# Altium PCB ESP32-Sense Kit Motherboard.PcbDoc
Units mil, origin at the board's own origin, x right, y up, seen from the top; angles counter-clockwise.
Board outline 2591.41 x 4407.24 mil, 2 copper layers (Top, Bottom), stack 12.7 mil thick; 70 components, 69 nets, 255 pads, 116 vias.
Unrouted connection lines stored in the file: 73.
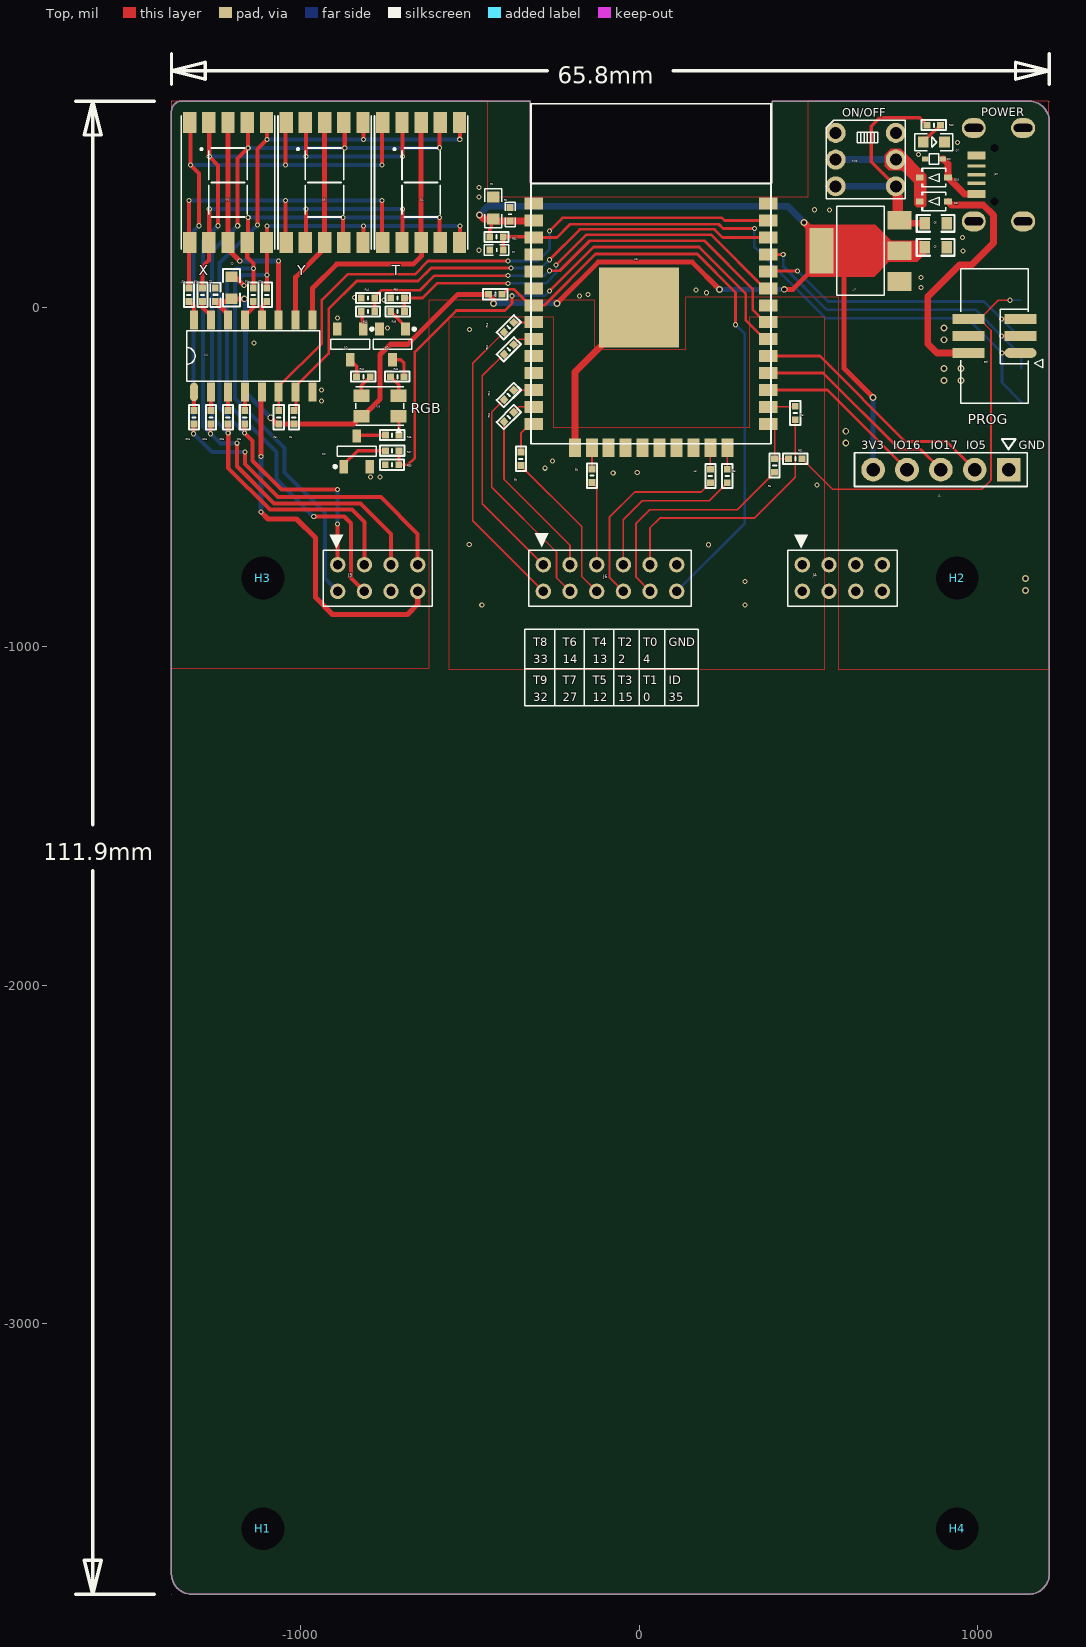
[diagram p0: Top view]
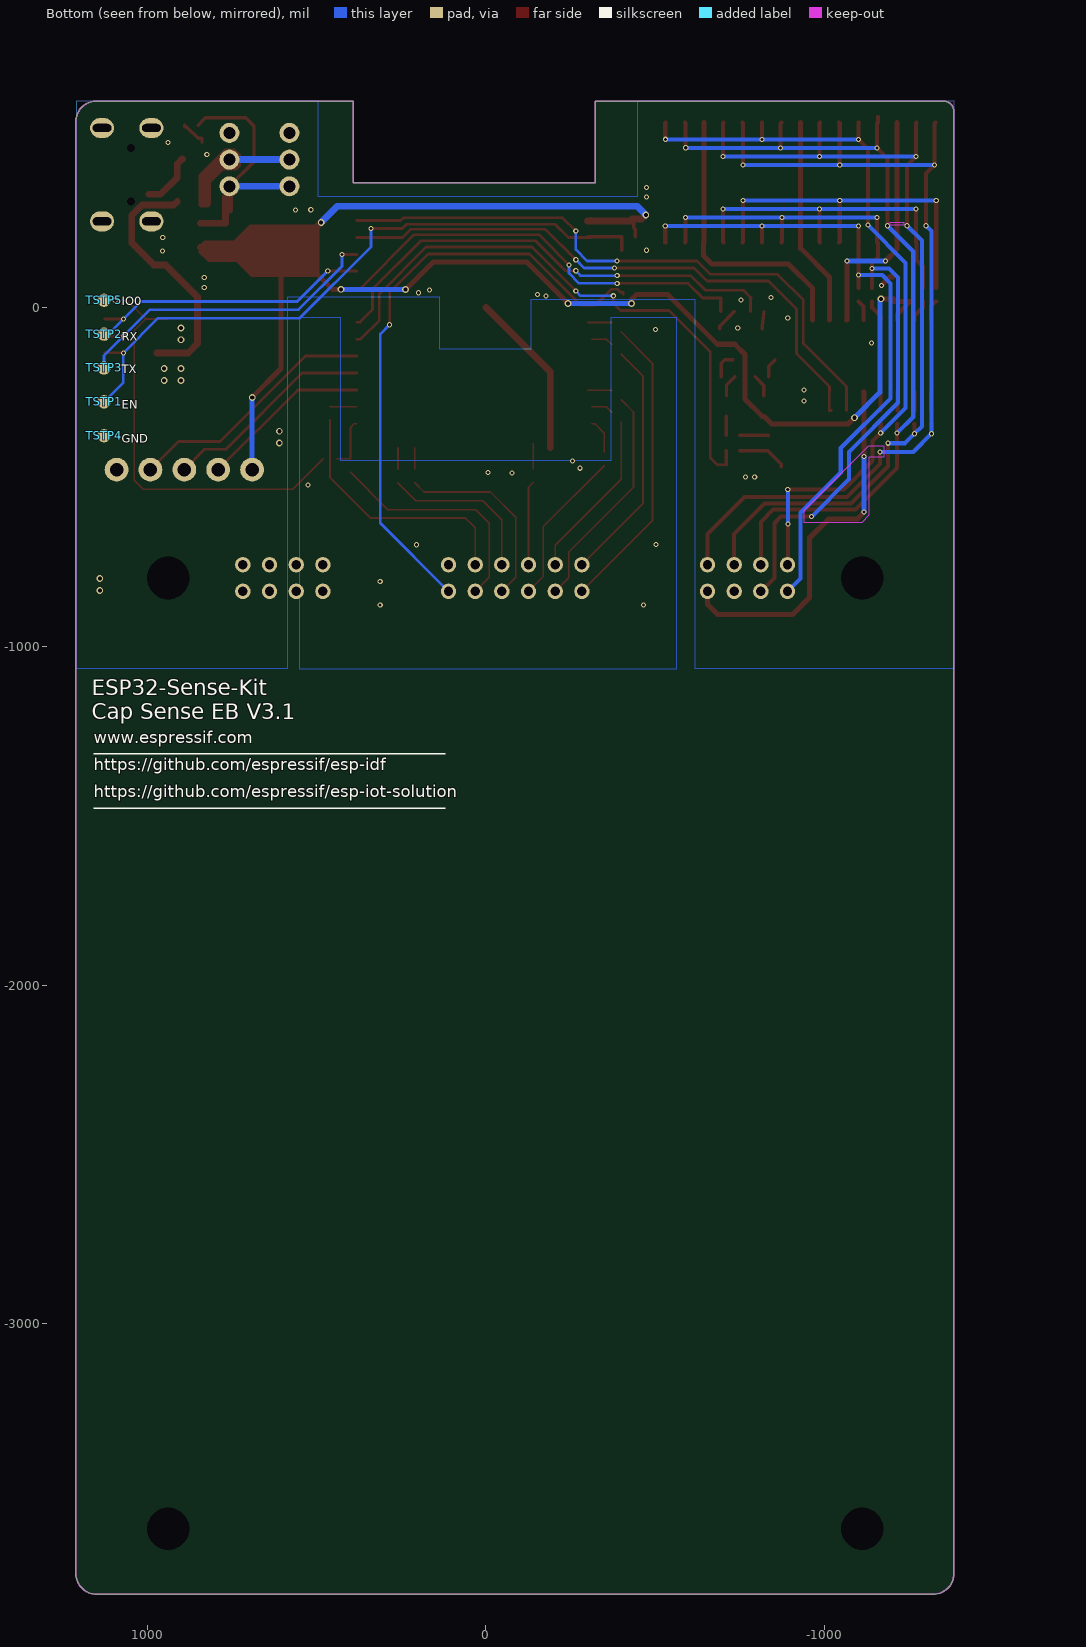
[diagram p1: Bottom view, seen from below]

## Layer stack, top to bottom
Solder Mask Top: solder mask 0.4, Solder Resist, Dk 3.5
Top: signal copper 1.35
Dielectric 1: dielectric 10, FR-4, Dk 4.3
Bottom: signal copper 1.35
Solder Mask Bottom: solder mask 0.4, Solder Resist, Dk 3.5

## Board outline
1210.64,550.32 1210.64,550.36 ccw(c1150.47,549.2) 1149.36,609.37 392,609.37 392,368 -322,368 -322,609.01 -1351.51,609.36 ccw(c-1351.51,580.11) -1380.77,580.12 -1380.77,-3738.81 ccw(c-1321.71,-3738.81) -1321.71,-3797.86 1149.36,-3797.86 1149.32,-3797.86 ccw(c1150.47,-3737.69) 1210.64,-3738.81 1210.64,-3318.98

## Design rules (kind name [scope] priority, off if disabled: settings)
Clearance "Clearance - Net - ESP_GPIO0_B" [InNet('ESP_GPIO0_B')] p1: gap=6 ignorepadtopadclearanceinfootprint=FALSE except(0: Arc-Hole Track-Hole SMDPad-Hole THPad-Hole Via-Hole Fill-Hole Poly-Hole Region-Hole Text-Hole; 8: THPad-Fill THPad-Poly THPad-Region Fill-Fill Fill-Poly Fill-Region Poly-Poly Poly-Region Region-Region; 10: SMDPad-Fill SMDPad-Poly SMDPad-Region Via-Fill Via-Poly Via-Region Text-Text; 30: Arc-Fill Arc-Poly Arc-Region Track-Fill Track-Poly Track-Region)
Clearance "Clearance - NetClass - ClearanceClass_3(RuleSet)" [InNetClass('ClearanceClass_3(RuleSet)')] p2: gap=6 ignorepadtopadclearanceinfootprint=FALSE except(0: Arc-Hole Track-Hole SMDPad-Hole THPad-Hole Via-Hole Fill-Hole Poly-Hole Region-Hole Text-Hole; 10: Text-Text; 40: Arc-Fill Arc-Poly Arc-Region Track-Fill Track-Poly Track-Region SMDPad-Fill SMDPad-Poly SMDPad-Region THPad-Fill THPad-Poly THPad-Region)
Clearance "Clearance - Default - DEFAULT - Via" [IsVia vs IsVia] p3: gap=6 ignorepadtopadclearanceinfootprint=FALSE
Clearance "Clearance - Default - DEFAULT- SMD" [IsVia vs IsSMTPin] p4: gap=6 ignorepadtopadclearanceinfootprint=FALSE
Clearance "Clearance - Default - DEFAULT - Net" [All] p5: gap=6 ignorepadtopadclearanceinfootprint=FALSE except(0: Arc-Hole Track-Hole SMDPad-Hole THPad-Hole Via-Hole Fill-Hole Poly-Hole Region-Hole Text-Hole; 8: Arc-Fill Arc-Poly Arc-Region Track-Fill Track-Poly Track-Region SMDPad-Fill SMDPad-Poly SMDPad-Region THPad-Fill THPad-Poly THPad-Region Via-Fill Via-Poly Via-Region Fill-Fill Fill-Poly Fill-Region Poly-Poly Poly-Region Region-Region; 10: Text-Text)
ComponentClearance "ComponentClearance - Default - DEFAULT" [All] p1: gap=6 collisioncheckmode=3 verticalgap=10 showdistances=FALSE
FanoutControl Fanout_Small [(CompPinCount < 5)] p1: bgadir=Out bgaviamode=Centered fanoutstyle=Auto fanoutdirection=OutThenIn viagrid=1 // Fanout_Small (Default Rule)
FanoutControl Fanout_BGA [IsBGA] p2: bgadir=Out bgaviamode=Centered fanoutstyle=Auto fanoutdirection=Alternating viagrid=1 // Fanout_BGA (Default Rule)
FanoutControl Fanout_LCC [IsLCC] p3: bgadir=Out bgaviamode=Centered fanoutstyle=Auto fanoutdirection=Alternating viagrid=1 // Fanout_LCC (Default Rule)
FanoutControl Fanout_SOIC [IsSOIC] p4: bgadir=Out bgaviamode=Centered fanoutstyle=Auto fanoutdirection=Alternating viagrid=1 // Fanout_SOIC (Default Rule)
HoleToHoleClearance "HoleToHoleClearance - Default - DEFAULT" [All] p1: gap=6 allowstackedmicrovias=TRUE
Length "Default Length" [All] p1: maxlimit=50000 minlimit=0
MaxMinImpedance "Default Impedance" [All] p1: minimum=50.00 maximum=150.0
ParallelSegment "Default Parallel Segment Adjasent" [All] p1: limit=1000 gap=200
ParallelSegment "Default Parallel Segment Same Layer" [All] p2: limit=1000 gap=200
PlaneConnect "Default PlaneConnect" [All] p1: planeconnectstyle=Relief reliefexpansion=20 reliefentries=0 reliefconductorwidth=8 reliefairgap=10
PolygonConnect "PolygonConnect - Default SMT" [IsSMTPin] p1: connectstyle=Direct reliefconductorwidth=10 reliefentries=4 polygonreliefangle="45 Angle" airgapwidth=10
PolygonConnect "PolygonConnect - Default Pad" [All] p2: connectstyle=Direct reliefconductorwidth=8 reliefentries=4 polygonreliefangle="45 Angle" airgapwidth=10
RoutingLayers "RoutingLayers - Default - DEFAULT" [All] p1: top layer_v5=TRUE bottom layer_v5=TRUE
RoutingPriority "RoutingPriority - Default - DEFAULT" [All] p1: routingpriority=3
RoutingTopology "Default Routing Topology" [All] p1: topology=Shortest
RoutingVias "RoutingVias - Default - DEFAULT" [All] p1: holewidth=9 width=15 viastyle="Through Hole" minholewidth=9 minwidth=15 maxholewidth=9 maxwidth=15
SMDToCorner "SMDToCorner - Default - DEFAULT" [All] p1: distance=60000
SolderMaskExpansion [All] p1: expansion=4
Width "Default Width" [All] p1: maxlimit=40 minlimit=5 preferedwidth=8
20 further rules are at their usual default settings.

## Classes and differential pairs
net class +5V*N169918061: +5V N169918061
net class +5V_A*VBUS_5V: +5V_A VBUS_5V
net class EN*VDD33: EN VDD33
net class ESP_IO18*N17021018: ESP_IO18 N17021018
net class ESP_IO19*N17021076: ESP_IO19 N17021076
net class N17021053*RGB_B-: N17021053 RGB_B-
net class ClearanceClass_3(RuleSet): ESP_TCH_0 ESP_TCH_0_A ESP_TCH_1 ESP_TCH_1_A ESP_TCH_2 ESP_TCH_2_A ESP_TCH_3 ESP_TCH_3_A ESP_TCH_4 ESP_TCH_4_A ESP_TCH_5 ESP_TCH_5_A ESP_TCH_6 ESP_TCH_6_A ESP_TCH_7 ESP_TCH_7_A ESP_TCH_8 ESP_TCH_8_A ESP_TCH_9 ESP_TCH_9_A

## Components (designator, comment, footprint, x,y, rotation, side; value= is the part's Value field where it differs from the comment)
C1 "0603C" 0603C -1203.27,58.64 r270 top
C2 "0402C" 0402C -1251.27,37.64 r270 top
C3 "0603C" 0603C 875.25,178.05 r180 top
C4 "C0603" C0603 -431.08,293.78 r270 top
C5 "C0402" C0402 -381.08,275.28 r90 top
C6 "0603C" 0603C 875.25,248.92 r180 top
C7 "C0402" C0402 -421.08,169.84 r180 top
D7 "0603D$2F$A" 0603D$2F$A 869.79,488.63 r0 top
D8 "SOD-323" SOD-323 869.79,313.63 r0 top
D9 "SOD-523" SOD-523 869.79,438.63 r180 top
D10 "SOD-323" SOD-323 869.79,383.63 r0 top
H1 "MTGH200C125D-N" MTGH200C125D-N -1110.77,-3604.57 r0 top
H2 "MTGH200C125D-N" MTGH200C125D-N 938.41,-798.25 r0 top
H3 "MTGH200C125D-N" MTGH200C125D-N -1110.77,-798.25 r0 top
H4 "MTGH200C125D-N" MTGH200C125D-N 938.41,-3604.57 r0 top
J1 "CON_5X1_2P54" CON_5X1_2P54 890.51,-478.26 r180 top
J4 "CON_F_4X2_2P00_IP" CON_F_4X2_2P00_IP 599.64,-798.25 r0 top
J5 "CON_F_4X2_2P00_IP" CON_F_4X2_2P00_IP -772,-798.25 r0 top
J6 "CON_F_6X2_2P00_IP" CON_F_6X2_2P00_IP -86.18,-798.25 r0 top
J37 "USB_5P" USB_5P 1133.41,392.42 r180 top
J38 "DC3-6P-1P27" DC3-6P-1P27 1048.88,-83.67 r90 top
Q1 "SOT-23-3" SOT-23-3 -853.27,-108.36 r270 top
Q2 "SOT-23-3" SOT-23-3 -833.74,-424.36 r90 top
Q3 "SOT-23-3" SOT-23-3 -728.27,-108.36 r270 top
R1 "0402R" 0402R -424.9,39.24 r0 top
R2 "0402R" 0402R -1019.27,-323.96 r90 top
R3 "0402R" 0402R -1064.27,-323.96 r90 top
R4 "0402R" 0402R 460.73,-311.36 r270 top
R5 "0402R" 0402R 399.73,-466.36 r270 top
R6 "0402R" 0402R 260.03,-497.17 r270 top
R7 "0402R" 0402R 210.03,-497.17 r270 top
R8 "0402R" 0402R -139.27,-496.36 r270 top
R9 "0402R" 0402R -349.27,-446.36 r270 top
R10 "0402R" 0402R -385,-323.11 r225 top
R11 "0402R" 0402R -385,-258.11 r225 top
R12 "0402R" 0402R -385,-123.11 r225 top
R13 "0402R" 0402R -385,-58.11 r225 top
R14 "0402R" 0402R -1099.27,37.64 r90 top
R15 "0402R" 0402R -1139.27,37.64 r90 top
R16 "0402R" 0402R -1289.27,37.64 r90 top
R17 "0402R" 0402R -1329.27,37.64 r90 top
R18 "0402R" 0402R -1314.27,-323.96 r270 top
R19 "0402R" 0402R -1264.27,-323.96 r270 top
R20 "0402R" 0402R -1214.27,-323.96 r270 top
R21 "0402R" 0402R -1164.27,-323.96 r270 top
R40 "0402R" 0402R 869.79,538.63 r0 top
R41 "0402R" 0402R -421.08,208.78 r0 top
R42 "0402R" 0402R -814.27,-203.86 r180 top
R43 "0402R" 0402R -800.77,-11.55 r180 top
R44 "0402R" 0402R -800.77,28.45 r0 top
R45 "0402R" 0402R -729.27,-376.36 r180 top
R46 "0402R" 0402R -714.27,-203.86 r0 top
R47 "0402R" 0402R -729.27,-422.36 r180 top
R48 "0402R" 0402R -713.27,-11.55 r180 top
R49 "0402R" 0402R -729.99,-463.69 r0 top
R50 "0402R" 0402R -713.27,28.45 r0 top
R51 "0402R" 0402R 460.73,-446.36 r180 top
SW1 "SW5858-6" SW5858-6 668.73,436.95 r270 top
TSTP1 "TP_1MM" TP_1MM 1127.51,-278.26 r180 bottom
TSTP2 "TP_1MM" TP_1MM 1127.51,-78.26 r180 bottom
TSTP3 "TP_1MM" TP_1MM 1127.51,-178.26 r180 bottom
TSTP4 "TP_1MM" TP_1MM 1127.51,-378.26 r180 bottom
TSTP5 "TP_1MM" TP_1MM 1127.51,21.74 r180 bottom
U2 "DGT10069" DGT10069 -643.81,369.31 r180 top
U4 "SOP16-150MIL" SOP16-150MIL -1139.27,-142.66 r90 top
U5 "DGT10069" DGT10069 -928.81,369.31 r180 top
U6 "DGT10069" DGT10069 -1213.81,369.31 r180 top
U7 "SOT-223" SOT-223 658.73,167.72 r90 top
U8 "ESP32_MODULE" ESP32_MODULE 34.65,100.21 r0 top
U9 "LED3528-4" LED3528-4 -765.27,-290.36 r0 top

## Footprints (in the part's own frame and the unit in brackets; to place one, negate y for a bottom-side part, rotate by r counter-clockwise, add the part's x,y. Pads: shape width x height; smd on the part's side, far side on the other; paste and mask are expansions set on the pad)
0402C [mil]
  rect 20x20 smd: 1(-20,0) 2(20,0)
  silkscreen extent -36,-15 36,15
0402R [mil]
  rect 20x20 smd: 1(-20,0) 2(20,0)
  silkscreen extent -36,-15 36,15
0603C [mil]
  rect 32x36 smd: 1(-32.5,0) 2(32.5,0)
  silkscreen extent -56,-25 56,25
0603D$2F$A [mm]
  rect 0.8x0.8 smd: 1(-0.8,0) 2(0.8,0)
  silkscreen extent -1.44,-0.64 1.44,0.64
C0402 [mil]
  rect 20x20 smd: 1(-20,0) 2(20,0)
  silkscreen extent -36,-15 36,15
C0603 [mil]
  rect 32x36 smd: 1(-32.5,0) 2(32.5,0)
  silkscreen extent -58,-25 58,25
CON_5X1_2P54 [mil]
  rect 70x70 / inner round 70 / far side round 70 hole 40: 1(-200,0)
  round 70 hole 40: 2(-100,0) 3(0,0) 4(100,0) 5(200,0)
  silkscreen extent -255,-90 255,50
CON_F_4X2_2P00_IP [mm]
  round 1.15 hole 0.7: 1(-3,1) 2(-1,1) 3(1,1) 4(3,1) 5(3,-1) 6(1,-1) 7(-1,-1) 8(-3,-1)
  silkscreen extent -4.1,-2.1 4.1,3.24
CON_F_6X2_2P00_IP [mm]
  round 1.15 hole 0.7: 1(-5,1) 2(-3,1) 3(-1,1) 4(1,1) 5(3,1) 6(5,1) 7(5,-1) 8(3,-1) 9(1,-1) 10(-1,-1) 11(-3,-1) 12(-5,-1)
  silkscreen extent -6.1,-2.1 6.1,3.34
DC3-6P-1P27 [mm]
  rrect100% 0.74x2.4 smd: 1(-1.27,-1.95)
  rect 0.74x2.4 smd: 2(0,-1.95) 3(1.27,-1.95) 4(1.27,1.95) 5(0,1.95) 6(-1.27,1.95)
  silkscreen extent -5.05,-2.54 5.05,2.54
DGT10069 [mm]
  rect 1x1.6 smd: 1(-2.88,-4.5) 2(-1.44,-4.5) 3(0,-4.5) 4(1.44,-4.5) 5(2.88,-4.5) 6(2.88,4.5) 7(1.44,4.5) 8(0,4.5) 9(-1.44,4.5) 10(-2.88,4.5)
  silkscreen extent -3.5,-5 3.5,5
ESP32_MODULE [mm]
  rect 1.4x0.9 smd: 1(-8.8,5.25) 2(-8.8,3.98) 3(-8.8,2.71) 4(-8.8,1.44) 5(-8.8,0.17) 6(-8.8,-1.1) 7(-8.8,-2.37) 8(-8.8,-3.64) 9(-8.8,-4.91) 10(-8.8,-6.18) 11(-8.8,-7.45) 12(-8.8,-8.72) 13(-8.8,-9.99) 14(-8.8,-11.26) 25(8.8,-11.26) 26(8.8,-9.99) 27(8.8,-8.72) 28(8.8,-7.45) 29(8.8,-6.18) 30(8.8,-4.91) 31(8.8,-3.64) 32(8.8,-2.37) 33(8.8,-1.1) 34(8.8,0.17) 35(8.8,1.44) 36(8.8,2.71) 37(8.8,3.98) 38(8.8,5.25)
  rect 0.9x1.4 smd: 15(-5.705,-13.06) 16(-4.435,-13.06) 17(-3.165,-13.06) 18(-1.895,-13.06) 19(-0.625,-13.06) 20(0.645,-13.06) 21(1.915,-13.06) 22(3.185,-13.06) 23(4.455,-13.06) 24(5.725,-13.06)
  rect 6x6 smd: 39(-0.88,-2.545)
  silkscreen extent -9,-12.75 9,12.75
LED3528-4 [mm]
  rect 1.2x0.95 smd: 1(1.4,-0.775) 2(-1.4,-0.775) 3(-1.4,0.775) 4(1.4,0.775)
  silkscreen extent -1.8,-2 1.8,1.45
MTGH200C125D-N [mm]
  round 0 hole 3.2 unplated: 1(0,0)
SOD-323 [mm]
  rect 0.59x0.45 smd: 1(-1.055,0) 2(1.055,0)
  silkscreen extent -0.9,-0.7 0.9,0.7
SOD-523 [mm]
  rect 0.48x0.4 smd: 1(-0.66,0) 2(0.66,0)
  silkscreen extent -0.35,-0.4 0.35,0.4
SOP16-150MIL [mm]
  rrect100% 1.4x0.6 smd: 1(-2.7,4.445)
  rect 1.4x0.6 smd: 2(-2.7,3.175) 3(-2.7,1.905) 4(-2.7,0.635) 5(-2.7,-0.635) 6(-2.7,-1.905) 7(-2.7,-3.175) 8(-2.7,-4.445) 9(2.7,-4.445) 10(2.7,-3.175) 11(2.7,-1.905) 12(2.7,-0.635) 13(2.7,0.635) 14(2.7,1.905) 15(2.7,3.175) 16(2.7,4.445)
  silkscreen extent -1.9,-4.99 1.9,4.99
SOT-23-3 [mm]
  rect 1x0.65 smd: 1(-1.15,0.97) 2(-1.15,-0.97) 3(1.15,0)
  silkscreen extent -1.24,-1.45 0.38,1.73
SOT-223 [mm]
  rect 1.4x1.8 smd: 1(-2.3,-2.796) 2(0,-2.796) 3(2.3,-2.796)
  rect 3.4x1.8 smd: 4(0,3.05)
  silkscreen extent -3.35,-1.65 3.35,1.91
SW5858-6 [mm]
  round 1.5 hole 0.9: 1(-2,-2.25) 2(0,-2.25) 3(2,-2.25) 4(-2,2.25) 5(0,2.25) 6(2,2.25)
  silkscreen extent -2.95,-2.95 2.95,2.95
TP_1MM [mm]
  round 1 smd paste-0.5: 1(0,0)
USB_5P [mm]
  rect 1.35x0.6 smd: 1(3.5,1.464) 5(3.5,-1.452)
  rect 1.35x0.25 smd: 2(3.5,0.65) 3(3.5,0) 4(3.5,-0.65)
  oval 1.8x1.5 hole 0.6 slot 1.4 at 0 deg: 6(3.7,3.5) 7(3.7,-3.5) 8(0,3.5) 9(0,-3.5)
  round 0 hole 0.6: 10(2.16,2) 11(2.16,-2)

## Via types
v1: diameter 15, hole 9, Top to Bottom, 97 vias
v2: diameter 20, hole 12, Top to Bottom, 19 vias

## Nets (pads, with @x,y where several pads share a name; then routed paths per layer and width w, separated by ;. In a path a pad name is that pad's centre, name@x,y a point inside that pad or via, vN(x,y) a via of type N, cw(c..) or ccw(c..) an arc to the next point about the centre after c; other vN are vias at no path point)
+5V: C6.2 R40.1 SW1.3 SW1.6 U7.3 | length 830.2
  Top w10: SW1.6 684.91,430.61 684.91,535.37 709.53,560 828.41,560 R40.1
  Top w20: SW1.6 757.31,288 768.81,326.51 U7.3 768.81,248.92 C6.2
  Bottom w20: SW1.3 SW1.6
+5V_A: D8.1 D10.1 SW1.2 SW1.5 | length 177.2
  Bottom w20: SW1.2 SW1.5
DGT_COM1: J5.5 U4.5 | length 1097.6
  Top w15: v1(-1116,-604) -1096,-624 -1011.63,-624 -955.27,-680.36 -955.27,-856 -905.27,-906 -684,-906 -653.89,-875.89 J5.5 ; v1(-1116,-440) -1116,-248.96 U4.5
  Bottom w15: v1(-1116,-604) v1(-1116,-440)
DGT_COM2: U2.3 U2.8 U4.9 | length 850.1
  Top w15: U4.9 -964.27,57.28 -893.27,128.28 -667.13,128.28 -642.35,153.06 -642.35,192.14 U2.8 U2.3
DGT_COM3: U4.10 U5.3 U5.8 | length 618.2
  Top w15: U4.10 -1014.27,89.64 -928.81,175.1 U5.3
DGT_COM4: U4.11 U6.3 U6.8 | length 712.1
  Top w15: U6.3 -1213.81,172.18 v1(-1179.27,137.64) ; v1(-1065.27,137.64) -1065.27,-36.36 U4.11
  Bottom w15: v1(-1179.27,137.64) v1(-1065.27,137.64)
DGT_SEG1: J5.8 R14.2 U2.10 U5.10 U6.10 | length 1993.9
  Top w12: R14.2 v1(-1099.27,95.64) -1099.27,190.99 U6.10 -1099.25,192.14 v1(-1099.25,240.78) ; U5.10 -814.25,192.14 v1(-814.25,240.78) ; U2.10 -529.25,192.14 v1(-529.25,240.78)
  Bottom w12: v1(-1099.27,95.64) -1169.77,95.64 -1193.77,71.64 -1193.77,-267.86 -1047.27,-414.36 -1047.27,-486.36 -928,-605.63 -928,-799.73 J5.8 ; v1(-1099.25,240.78) v1(-814.25,240.78) v1(-529.25,240.78)
DGT_SEG1_A: R14.1 U4.12 | length 60.2
  Top w12: U4.12 -1114.27,2.64 R14.1
DGT_SEG2: J5.7 R15.2 U2.9 U5.9 U6.9 | length 2169.5
  Top w12: v1(-1154.25,265.78) -1154.25,192.14 U6.9 -1157.12,173.64 -1157.12,147.49 -1139.27,129.64 v1(-1139.27,115.64) R15.2 ; v1(-960.77,-617.13) -870.77,-617.13 -851.27,-636.63 -851.27,-797.72 J5.7 ; v1(-874.25,265.78) -874.25,194.28 U5.9 ; v1(-589.25,265.78) -589.25,194.28 U2.9
  Bottom w12: v1(-1154.25,265.78) v1(-874.25,265.78) v1(-589.25,265.78) ; v1(-1139.27,115.64) -1189.77,115.64 -1216.77,88.64 -1216.77,-280.86 -1071.27,-426.36 -1071.27,-506.63 -961.21,-617.56 -960.77,-618 v1(-960.77,-617.13)
DGT_SEG2_A: R15.1 U4.13 | length 64.4
  Top w12: U4.13 -1164.27,-25 -1139.27,0 R15.1
DGT_SEG3: R16.2 U2.7 U5.7 U6.7 | length 1009.7
  Top w12: R16.2 -1289.27,121.11 -1270.5,139.87 U6.7 -1269.25,193.4 v1(-1269.25,290.78) ; U5.7 -984.25,193.4 v1(-984.25,290.78) ; U2.7 -699.25,193.4 v1(-699.25,290.78)
  Bottom w12: v1(-1269.25,290.78) v1(-984.25,290.78) v1(-699.25,290.78)
DGT_SEG3_A: R16.1 U4.15 | length 64.4
  Top w12: R16.1 -1289.27,0 -1264.27,-25 U4.15
DGT_SEG4: R17.2 U2.6 U5.6 U6.6 | length 1078.8
  Top w12: R17.2 -1329.27,190.07 U6.6 -1329.25,194.2 v1(-1329.25,315.78) ; v1(-1044.25,315.78) -1044.25,194.2 U5.6 ; v1(-759.25,315.78) -759.25,194.2 U2.6
  Bottom w12: v1(-1329.25,315.78) v1(-1044.25,315.78) v1(-759.25,315.78)
DGT_SEG4_A: R17.1 U4.16 | length 61.2
  Top w12: R17.1 -1327.64,17.64 -1314.27,4.27 U4.16
DGT_SEG5: J5.4 R18.2 U2.5 U5.5 U6.5 | length 2680.1
  Top w12: U6.5 -1324.25,543.53 v1(-1324.25,420.78) -1299.27,395.8 v1(-1299.27,241.64) ; v1(-1315.27,-372.36) -1315.27,-343.96 R18.2 ; v1(-1163.27,-426.36) -1163.27,-462.13 -1066.27,-559.13 -762.9,-559.13 -653.89,-668.13 J5.4 ; v1(-1044.25,420.78) -1044.25,544.42 U5.5 ; v1(-759.25,420.78) -759.25,544.42 U2.5
  Bottom w12: v1(-1324.25,420.78) v1(-1044.25,420.78) v1(-759.25,420.78) ; v1(-1299.27,241.64) -1315.27,225.64 v1(-1315.27,-372.36) -1261.27,-426.36 v1(-1163.27,-426.36)
DGT_SEG5_A: R18.1 U4.1 | length 55
  Top w12: R18.1 U4.1
DGT_SEG6: J5.3 R19.2 U2.4 U5.4 U6.4 | length 2545
  Top w12: U6.4 -1269.25,545.22 v1(-1269.25,445.78) -1243.27,419.8 v1(-1243.27,241.64) ; v1(-1265.27,-372.36) -1265.27,-343.96 R19.2 ; v1(-1187.27,-400.36) -1187.27,-468.36 -1077.5,-578.13 -822.64,-578.13 -732.63,-668.13 J5.3 ; U5.4 -984.25,545.22 v1(-984.25,445.78) ; U2.4 -699.25,545.22 v1(-699.25,445.78)
  Bottom w12: v1(-1269.25,445.78) v1(-984.25,445.78) v1(-699.25,445.78) ; v1(-1243.27,241.64) -1287.27,197.64 -1287.27,-350.36 v1(-1265.27,-372.36) -1237.27,-400.36 v1(-1187.27,-400.36)
DGT_SEG6_A: R19.1 U4.2 | length 55
  Top w12: R19.1 U4.2
DGT_SEG7: J5.2 R20.2 U2.2 U5.2 U6.2 | length 2441.6
  Top w12: R20.2 -1213.27,-343.96 v1(-1213.27,-370.36) -1213.27,-473.13 -1090.27,-596.13 -847.77,-596.13 -811.37,-632.53 J5.2 ; v1(-1185.27,241.64) -1185.27,439.77 v1(-1154.25,470.78) -1154.25,543.61 U6.2 U6.2@-1157.12,562.92 ; U5.2 -869.25,543.61 v1(-869.25,470.78) ; v1(-589.77,471.87) -589.25,471.87 -589.25,544.34 U2.2
  Bottom w12: v1(-1213.27,-370.36) -1261.27,-322.36 -1261.27,165.64 v1(-1185.27,241.64) ; v1(-1154.25,470.78) v1(-869.25,470.78) -589.77,470.78 v1(-589.77,471.87)
DGT_SEG7_A: R20.1 U4.3 | length 55
  Top w12: R20.1 U4.3
DGT_SEG8: J5.1 R21.2 U2.1 U5.1 U6.1 | length 2307.5
  Top w12: R21.2 -1165.27,-343.96 v1(-1165.27,-370.36) -1141.27,-394.36 -1141.27,-452.13 -1056.27,-537.13 v1(-890.77,-537.13) ; v1(-1127.27,243.64) -1127.27,467.77 v1(-1099.25,495.78) -1099.25,546.47 U6.1 ; v1(-891.27,-638.36) -891.27,-758.88 J5.1 ; U5.1 -814.25,546.47 v1(-814.25,495.78) ; U2.1 -529.25,545.3 -529.25,496.87 v1(-529.77,496.87)
  Bottom w12: v1(-1165.27,-370.36) -1238.77,-296.86 -1238.77,132.14 v1(-1127.27,243.64) ; v1(-1099.25,495.78) v1(-814.25,495.78) -529.77,495.78 v1(-529.77,496.87) ; v1(-891.27,-638.36) -891.27,-537.13 v1(-890.77,-537.13)
DGT_SEG8_A: R21.1 U4.4 | length 55
  Top w12: R21.1 U4.4
EN: C7.1 J38.1 R41.2 TSTP1.1 U8.3 | length 1963.2
  Top w8: U8.3 -243.25,206.9 -204,246.14 234.73,246.14 247.23,233.64 v1(339.73,233.64) ; v1(1070.65,-133.67) J38.1
  Top w10: C7.1 R41.2 -300,208.78 U8.3
  Bottom w8: v1(339.73,233.64) 339.73,178.9 549.73,-31.1 968.08,-31.1 v1(1070.65,-133.67) 1070.65,-221.4 TSTP1.1
ESP_GPIO0_B: J38.4 R51.1 TSTP5.1 | length 1307
  Top w5: R51.1 570.63,-536.26 1011.51,-536.26 1038.51,-509.26 1038.51,-67.39 J38.4@1004.79,-33.67 ; J38.4@939.2,-33.67 J38.4@1004.79,-33.67 ; v1(1094.51,21.74) 1060.2,21.74 J38.4@1004.79,-33.67
  Bottom w5: v1(1094.51,21.74) TSTP5.1
ESP_IO5: J1.2 U8.29 | length 748.2
  Top w8: U8.29 533.1,-143.1 785,-395 907.25,-395 J1.2
ESP_IO16: J1.4 U8.27 | length 506.8
  Top w8: U8.27 555.35,-243.1 J1.4
ESP_IO17: J1.3 U8.28 | length 627.5
  Top w8: U8.28 543.1,-193.1 768.1,-418.1 830.35,-418.1 J1.3
ESP_IO18: R47.1 R49.2 U8.30 | length 1753.3
  Top w8: R49.2 -709.27,-463.69 -682.4,-463.69 -662.4,-443.69 -662.4,-130.76 -539.9,-8.26 -396.77,-8.26 -375.77,12.74 v1(-375.77,34.87) ; v1(-265.08,48.78) -135.22,178.64 176.87,178.64 314.73,40.78 314.73,-37.67 370.16,-93.1 U8.30
  Top w10: R49.2@-709.27,-463.69 R47.1
  Bottom w8: v1(-375.77,34.87) -278.99,34.87 v1(-265.08,48.78)
ESP_IO19: R43.1 R44.2 U8.31 | length 1411.7
  Top w8: R44.2 -782.84,28.45 -760.15,51.14 -647.4,51.14 -604.3,94.24 v1(-387.4,94.24) ; v1(-265.08,108.78) -234.58,108.78 -146.08,197.28 192.23,197.28 334.73,54.78 334.73,-6.17 371.66,-43.1 U8.31
  Top w10: R43.1 R44.2
  Bottom w8: v1(-387.4,94.24) -279.13,94.24 -264.83,108.53 v1(-265.08,108.78)
ESP_IO21: R48.1 R50.2 U8.33 | length 1271.7
  Top w8: R50.2 -639.9,28.45 -596.62,71.74 v1(-387.4,71.74) ; v1(-245.08,126.28) -156.08,215.28 212.23,215.28 370.62,56.9 U8.33
  Top w10: R48.1 R50.2
  Bottom w8: v1(-387.4,71.74) -275.08,71.74 -245.08,101.74 v1(-245.08,126.28)
ESP_IO22: R2.2 U4.7 U8.36 | length 1752.4
  Top w8: R2.2 -1013.27,-303.96 -1013.27,-248.96 U4.7 -1014.27,-233.21 -916.77,-135.71 -916.77,-4.72 -833.77,78.28 -652.4,78.28 -613.94,116.74 -387.4,116.74 v1(-378.77,116.87) ; v1(-265.08,141.28) -175.22,231.14 222.23,231.14 246.48,206.9 U8.36
  Bottom w8: v1(-378.77,116.87) -378.77,116.74 -289.63,116.74 v1(-265.08,141.28)
ESP_IO23: R3.2 U4.6 U8.37 | length 1833.1
  Top w8: R3.2 -1064.27,-233.21 -936.77,-105.71 -936.77,22.28 -860.77,98.28 -662.4,98.28 -623.04,137.64 v1(-387.27,137.64) ; v1(-265.08,226.28) -226.22,265.14 243.87,265.14 252.12,256.9 U8.37
  Bottom w8: v1(-387.27,137.64) -298.77,137.64 -265.08,171.33 v1(-265.08,226.28)
ESP_IO35: J6.7 R1.2 U8.7 | length 1805.4
  Top w8: R1.2 -404.9,45.24 -397.4,45.24 -388.4,54.24 -369.9,54.24 -322.56,6.9 U8.7 -280.08,6.9 -128.7,158.28 171.23,158.28 284.23,44.87 v1(284.23,-50.63)
  Bottom w8: J6.7 311.73,-636.56 311.73,-78.13 v1(284.23,-50.63)
ESP_RXD0: J38.3 TSTP2.1 U8.34 | length 879.9
  Top w8: U8.34 382.1,107.9 v1(467.1,107.9) ; v1(1069.65,-33.67) J38.3
  Bottom w8: v1(467.1,107.9) 557.1,17.9 1018.08,17.9 v1(1069.65,-33.67) 1114.24,-78.26 TSTP2.1
ESP_TCH_0: J6.5 R4.2 | length 768.7
  Top w5: J6.5 31.93,-650 60.57,-621.36 339.73,-621.36 460.73,-500.36 R4.2
ESP_TCH_0_A: R4.1 U8.26 | length 80.4
  Top w5: U8.26 458.99,-293.1 R4.1
ESP_TCH_1: J6.8 R5.2 | length 689.5
  Top w5: J6.8 -9.27,-796.42 -9.27,-636.36 30.73,-596.36 289.73,-596.36 R5.2
ESP_TCH_1_A: R5.1 R51.2 U8.25 | length 156.9
  Top w5: U8.25 389.57,-343.1 399.73,-353.26 R5.1 R51.2
ESP_TCH_2: J6.4 R6.2 | length 484.6
  Top w5: J6.4 -46.81,-626.36 9.38,-570.17 207.03,-570.17 R6.2
ESP_TCH_2_A: R6.1 U8.24 | length 63.2
  Top w5: R6.1 U8.24
ESP_TCH_3: J6.9 R7.2 | length 575.9
  Top w5: J6.9 -87.97,-796.46 -87.97,-618.86 -13.28,-544.17 183.03,-544.17 R7.2
ESP_TCH_3_A: R7.1 U8.23 | length 63.2
  Top w5: R7.1 U8.23
ESP_TCH_4: J6.3 R8.2 | length 248.2
  Top w5: R8.2 -125.55,-530.08 J6.3
ESP_TCH_4_A: R8.1 U8.16 | length 86
  Top w5: U8.16 -139.27,-402.17 R8.1
ESP_TCH_5: J6.10 R9.2 | length 463.9
  Top w5: R9.2 -169.27,-646.36 -169.27,-793.9 J6.10
ESP_TCH_5_A: R9.1 U8.14 | length 104.5
  Top w5: R9.1 -349.27,-370.71 -321.66,-343.1 U8.14
ESP_TCH_6: J6.2 R10.2 | length 502.3
  Top w5: R10.2 -399.15,-506.36 -204.29,-701.21 J6.2
ESP_TCH_6_A: R10.1 U8.13 | length 65.6
  Top w5: R10.1 -355,-293.11 U8.13
ESP_TCH_7: J6.11 R11.2 | length 676
  Top w5: R11.2 -435.27,-308.37 -435.27,-530.36 -243.97,-721.66 -243.97,-797.94 J6.11
ESP_TCH_7_A: R11.1 U8.12 | length 82.7
  Top w5: R11.1 -300,-243.96 U8.12
ESP_TCH_8: J6.1 R12.2 | length 722.8
  Top w5: R12.2 -463.27,-201.37 -463.27,-578.64 J6.1
ESP_TCH_8_A: R12.1 U8.9 | length 65.6
  Top w5: R12.1 -355,-93.1 U8.9
ESP_TCH_9: J6.12 R13.2 | length 898.4
  Top w5: R13.2 -491.27,-164.37 -491.27,-629.38 J6.12 J6.12@-283.03,-846.28
ESP_TCH_9_A: R13.1 U8.8 | length 82.7
  Top w5: R13.1 -300,-43.96 U8.8
ESP_TXD0: J38.2 TSTP3.1 U8.35 | length 983.1
  Top w8: U8.35 v1(425.1,156.9) ; v1(1069.65,-83.67) J38.2
  Bottom w8: v1(425.1,156.9) 425.1,122.15 553.35,-6.1 992.08,-6.1 v1(1069.65,-83.67) 1127.51,-141.53 TSTP3.1
GND: C1.1 C2.1 C3.1 C4.1 C5.2 C6.1 C7.2 D7.2 D9.2 J1.1 J6.6 J37.5 J37.6 J37.7 J37.8 J37.9 J38.5 Q1.2 Q2.2 Q3.2 R44.1 R49.1 R50.1 TSTP4.1 U4.8 U7.1 U8.1 U8.15 U8.38 U8.39 | length 539.2
  Top w12: C1.1 C1.1@-1201.27,91.14
  Top w15: C1.1@-1201.27,91.14 -1192.77,91.14 v1(-1167.27,65.64)
  Top w20: U8.15 -189.97,-189.97 U8.39
  other v1: -464.77,-878.13 312.23,-878.13 312.23,-808.13 204.64,-700.06 -501.77,-699.13 525.23,-523.13 -793.27,-500.63 -765.77,-500.63 -76.77,-488.13 -5.77,-487.13 -277.77,-474.13 -255.77,-453.13 -938.27,-275.63 -938.27,-243.13 -1137.77,-104.13 -500.77,-65.13 -743.27,-60.63 -890.77,-30.63 -753.27,21.87 -840.77,29.37 -176.77,33.87 -151.77,38.87 199.23,43.87 167.23,51.87 831.73,59.37 831.73,89.37 955.23,166.87 -473.27,169.37 954.23,206.87 562.23,287.87 517.23,288.87 -473.27,326.87 -473.27,354.37 824.23,451.87 939.23,486.87
  other v2: 1140,-835 1140,-800 610,-400 610,-365 900,-215 950,-215 900,-180 950,-180 900,-95 900,-60
N17020966: Q2.3 R45.2 | length 87.2
  Top w10: Q2.3 -833.74,-376.36 R45.2
N17021018: Q2.1 R47.2 | length 146.3
  Top w10: Q2.1 -871.93,-462.75 -831.54,-422.36 R47.2
N17021053: Q1.3 R42.2 | length 58.1
  Top w10: Q1.3 -834.27,-172.64 R42.2
N17021076: Q1.1 R43.2 | length 51.9
  Top w10: R43.2 -815.08,-54.74 Q1.1
N17021116: Q3.3 R46.2 | length 78.2
  Top w10: Q3.3 -704.47,-153.64 -694.27,-163.84 R46.2
N17021148: Q3.1 R48.2 | length 69.4
  Top w10: R48.2 -690.08,-54.74 Q3.1
N169918061: D7.1 R40.2 | length 81
  Top w10: D7.1 838.29,499.37 849.04,499.37 884.79,533.63 889.79,533.63 R40.2
RGB_B-: R42.1 U9.3 | length 66.8
  Top w10: U9.3 -820.38,-229.98 R42.1
RGB_G-: R46.1 U9.4 | length 66
  Top w10: R46.1 -710.15,-227.98 U9.4
RGB_R-: R45.1 U9.1 | length 56.4
  Top w10: U9.1 -709.27,-320.87 R45.1
VBUS_5V: D9.1 D10.2 J37.1 | length 166.9
  Top w20: D9.1 897.35,438.63 911.32,424.66 D10.2 960.16,334.78 J37.1
VCC_5V: D8.2 J38.6 | length 763
  Top w20: D8.2 922.04,302.9 1015.51,302.9 1045.51,272.9 1045.51,190.74 980.51,125.74 945.51,125.74 851.51,31.74 851.51,-106.26 878.92,-133.67 J38.6
VDD33: C1.2 C2.2 C3.2 C4.2 C5.1 J1.5 R1.1 R2.1 R3.1 R41.1 U4.14 U7.2 U7.4 U8.2 U9.2 | length 4757.9
  Top w10: R41.1 -441.08,231.28 -436.58,235.78 -436.58,261.28 C4.2
  Top w15: U4.14 -1214.27,-19.36 C2.2 -1203.27,17.64 C1.2 -1203,25.87 v2(-1165.77,25.87) ; v2(-1087.77,-325.13) -1068.94,-343.96 R3.1 -1050.77,-343.96 R2.1 -843.47,-343.96 U9.2 -815.46,-320.87 -764.9,-270.31 -764.9,-138.7 -734.46,-108.26 -683.01,-108.26 -535.51,39.24 R1.1 -429.77,24.11 v2(-429.77,11.87) ; v2(-242.4,11.74) -242.4,12.91 -121.08,134.24 156.64,134.24 v2(237.23,53.64) ; v2(428.1,53.9) 453.51,53.9 540.92,141.31 U7.4@540.92,167.72 ; U7.4 U7.4@540.92,167.72 ; v2(690,-265) 605,-180 605,152.72 590,167.72 U7.4@540.92,167.72
  Top w20: v2(-471.77,273.64) -459.27,261.14 -459.13,261.28 C4.2@-436.58,261.28 ; C4.2 -431.08,255.28 C5.1 -300,255.28 U8.2 ; v2(486.42,251.28) 538.65,199.05 U7.4 ; U7.2 768.81,178.05 C3.2
  Bottom w15: v2(-1165.77,25.87) -1162.77,22.87 -1162.77,-250.13 v2(-1087.77,-325.13) ; v2(-429.77,11.87) -422.4,11.74 v2(-242.4,11.74) ; v2(237.23,53.64) 337.87,53.64 338.1,53.87 v2@431.1,53.87 ; v2(428.1,53.9) v2@431.1,53.9 ; v2(690,-265) 690.51,-265 J1.5
  Bottom w20: v2(-471.77,273.64) -446.03,299.37 438.33,299.37 v2(486.42,251.28)
pads on no net: H1.1 H2.1 H3.1 H4.1 J4.1 J4.2 J4.3 J4.4 J4.5 J4.6 J4.7 J4.8 J5.6 J37.2 J37.3 J37.4 J37.10 J37.11 SW1.1 SW1.4 U8.4 U8.5 U8.6 U8.10 U8.11 U8.17 U8.18 U8.19 U8.20 U8.21 U8.22 U8.32

## Polygon pours and split planes (outlines as drawn)
GND on Bottom "Bottom-GND" (solid, remove dead copper, pour order 0): -1381.14,611.01 -1381.14,-1066.26 -617.77,-1066.26 -617.77,23.87 -132.77,23.87 -132.77,-123.13 137.23,-123.13 137.23,29.87 587.23,29.87 587.23,-1066.63 1208.04,-1066.63 1208.04,611.01 497.23,611.01 497.23,328.37 -447.77,328.37 -447.77,611.01
GND on Bottom "Bottom-GND 1" (solid, remove dead copper, pour order 6): -561.77,-28.13 -561.77,-1068.13 549.23,-1068.13 549.23,-28.13 430.23,-28.13 430.23,-451.13 -369.77,-451.13 -369.77,-28.13
GND on Top "Top-GND" (solid, remove dead copper, pour order 2): -562.77,-28.26 -562.77,-1068.26 547.6,-1068.26 547.6,-28.26 325.23,-28.26 325.23,-355.13 -252.77,-355.13 -252.77,-28.26
GND on Top "Top-GND 1" (solid, remove dead copper, pour order 4): -1380.77,609.37 -1380.77,-1064.26 -619.77,-1064.26 -619.77,23.87 -132.4,23.87 -132.4,-123.26 137.6,-123.26 137.6,31.87 587.6,31.87 587.6,-1068.26 1208.41,-1068.26 1208.41,609.37 497.6,609.37 497.6,326.37 -447.4,326.37 -447.4,609.37

## Keep-outs
Bottom:
  region: -938,-634 -1110,-634 -1132,-612 -1132,-440 -1176,-440 -1176,-410 -1128,-410 -938,-600 -938,-634
  region: -1234,250 -1192,250 -1192,244 -1234,244 -1234,250
Keep-Out Layer:
  lines w4: 1149.31,-3797.86 ccw(c1150.47,-3737.69) 1210.64,-3738.85 1210.64,-3318.98 1210.64,550.32 ; 1149.32,609.37 cw(c1150.47,549.2) 1210.64,550.36 ; 1149.36,-3797.86 -1321.71,-3797.86 cw(c-1321.71,-3738.81) -1380.77,-3738.81 -1380.77,580.12 cw(c-1351.51,580.11) -1351.51,609.36 -322,609.01 -322,368 392,368 392,609.37 1149.36,609.37

## Other copper
Top:
  region net +5V_A: 742.09,468.44 724.28,450.63 724.28,417.26 736.09,405.45 775.46,405.45 811.88,369.03 811.88,303.09 819.26,295.71 842.39,295.71 848.05,301.37 848.05,391.92 771.52,468.44 742.09,468.44
  region net VDD33: 505.62,244.98 491.84,231.2 491.84,103.25 503.65,91.44 693.61,91.44 736.91,134.74 820.58,134.74 848.14,162.3 848.14,181.99 832.39,197.74 744.17,197.74 696.93,244.98 505.62,244.98

## Silkscreen, mask and mechanical layers (free items; w line width, h text height)
Silkscreen Top:
  lines w1: -1380.77,-3797.86 -1380.74,-3797.86 ; 1210.64,609.36 1210.67,609.36 ; -1380.77,609.36 -1380.74,609.36 -1380.77,609.36
  lines w4: -337.5,-1066.5 175,-1066.5 ; -250,-1175 -250,-950 ; -162.5,-1175 -162.5,-950 ; -75,-1175 -75,-950 ; 0,-1175 0,-950 ; 75,-1175 75,-950 ; 1148.51,-165.26 1065.51,-165.26 1065.51,-5.26 1148.51,-5.26 ; -337.5,-1176 175,-1176 175,-950 -337.5,-950 -337.5,-1176 ; 1165.51,-164.76 1190.51,-152.26 1190.51,-177.26 1165.51,-164.76
  lines w10: -1663,-3797.86 -1430.77,-3797.86 ; -1663,609.36 -1430.77,609.36 ; -1613,-1661.75 -1613,-3797.86 ; -1613,-1526.75 -1613,609.36 ; -1380.77,659.36 -1380.77,749 ; -270.75,699 -1380.77,699 ; 100.62,699 1210.64,699 ; 1210.64,659.36 1210.64,749 ; -1613,-3797.86 -1638,-3697.86 -1588,-3697.86 -1613,-3797.86 ; -1613,609.36 -1588,509.36 -1638,509.36 -1613,609.36 ; -1380.77,699 -1280.77,724 -1280.77,674 -1380.77,699 ; 1210.64,699 1110.64,674 1110.64,724 1210.64,699
  text "65.8mm" at -240.75,661.5 h50
  text "POWER" at 1010,565 h25
  text "ON/OFF" at 600,563 h25
  text "X" at -1300.18,95 h30
  text "Y" at -1010.18,95 h30
  text "T" at -730.18,95 h30
  text "RGB" at -675,-312.5 h30
  text "PROG" at 970,-345 h30
  text "3V3" at 655.51,-418.26 h25
  text "IO16" at 750.51,-418.26 h25
  text "IO17" at 860.51,-418.26 h25
  text "IO5" at 965.51,-418.26 h25
  text "GND" at 1120.51,-418.26 h25
  text "T8" at -312.5,-1000 h25
  text "T6" at -225,-1000 h25
  text "T4" at -137.5,-1000 h25
  text "T2" at -62.5,-1000 h25
  text "T0" at 12.5,-1000 h25
  text "GND" at 87.5,-1000 h25
  text "33" at -312.5,-1050 h25
  text "14" at -225,-1050 h25
  text "13" at -137.5,-1050 h25
  text "2" at -62.5,-1050 h25
  text "4" at 12.5,-1050 h25
  text "T9" at -312.5,-1112.5 h25
  text "T7" at -225,-1112.5 h25
  text "T5" at -137.5,-1112.5 h25
  text "T3" at -62.5,-1112.5 h25
  text "T1" at 12.5,-1112.5 h25
  text "ID" at 87.5,-1112.5 h25
  text "32" at -312.5,-1162.5 h25
  text "27" at -225,-1162.5 h25
  text "12" at -137.5,-1162.5 h25
  text "15" at -62.5,-1162.5 h25
  text "0" at 12.5,-1162.5 h25
  text "35" at 87.5,-1162.5 h25
  text "111.9mm" at -1763,-1631.75 h50
Silkscreen Bottom:
  lines w3.94: 120.58,-1317.43 1158.63,-1317.43 ; 120.98,-1477.43 1158.63,-1477.43
  text "IO0" at 1075.51,6.74 h25
  text "RX" at 1075.51,-98.26 h25
  text "TX" at 1075.51,-193.26 h25
  text "EN" at 1075.51,-298.26 h25
  text "GND" at 1075.51,-398.26 h25
  text "ESP32-Sense-Kit" at 1163.82,-1160 h80
  text "Cap Sense EB V3.1" at 1163.82,-1231.75 h80
  text "www.espressif.com" at 1158.63,-1297.43 h60
  text "https://github.com/espressif/esp-idf" at 1158.63,-1377.43 h60
  text "https://github.com/espressif/esp-iot-solution" at 1158.63,-1457.43 h60